# EAGLE board pihat (EAGLE 9.4.2)
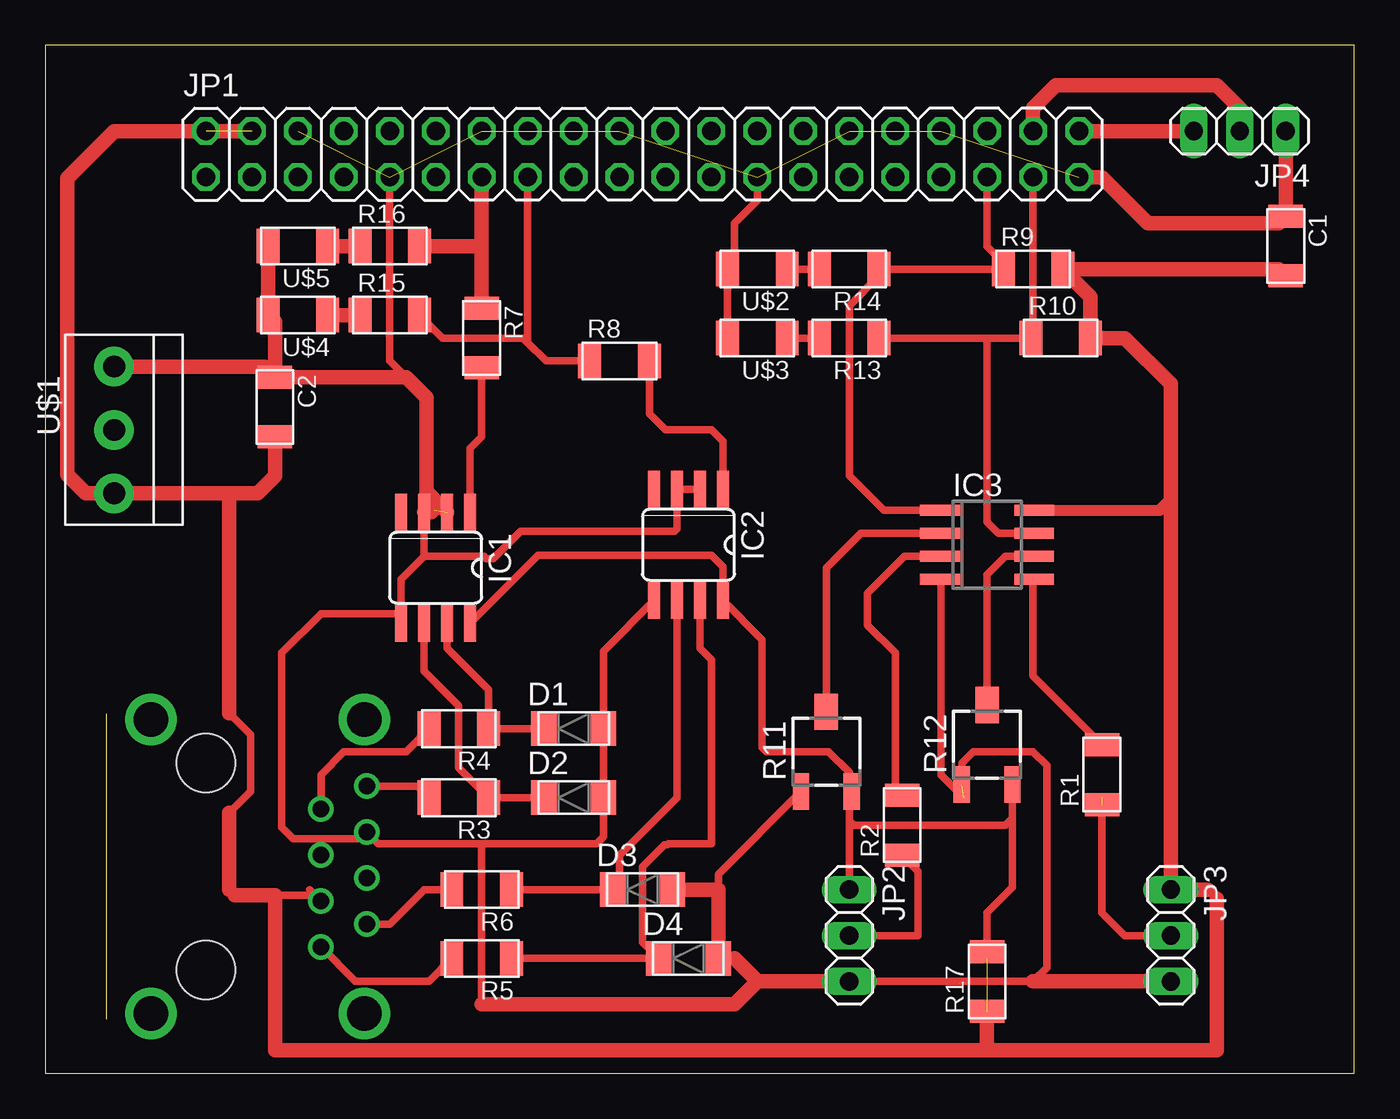
[diagram p0: board, top side]
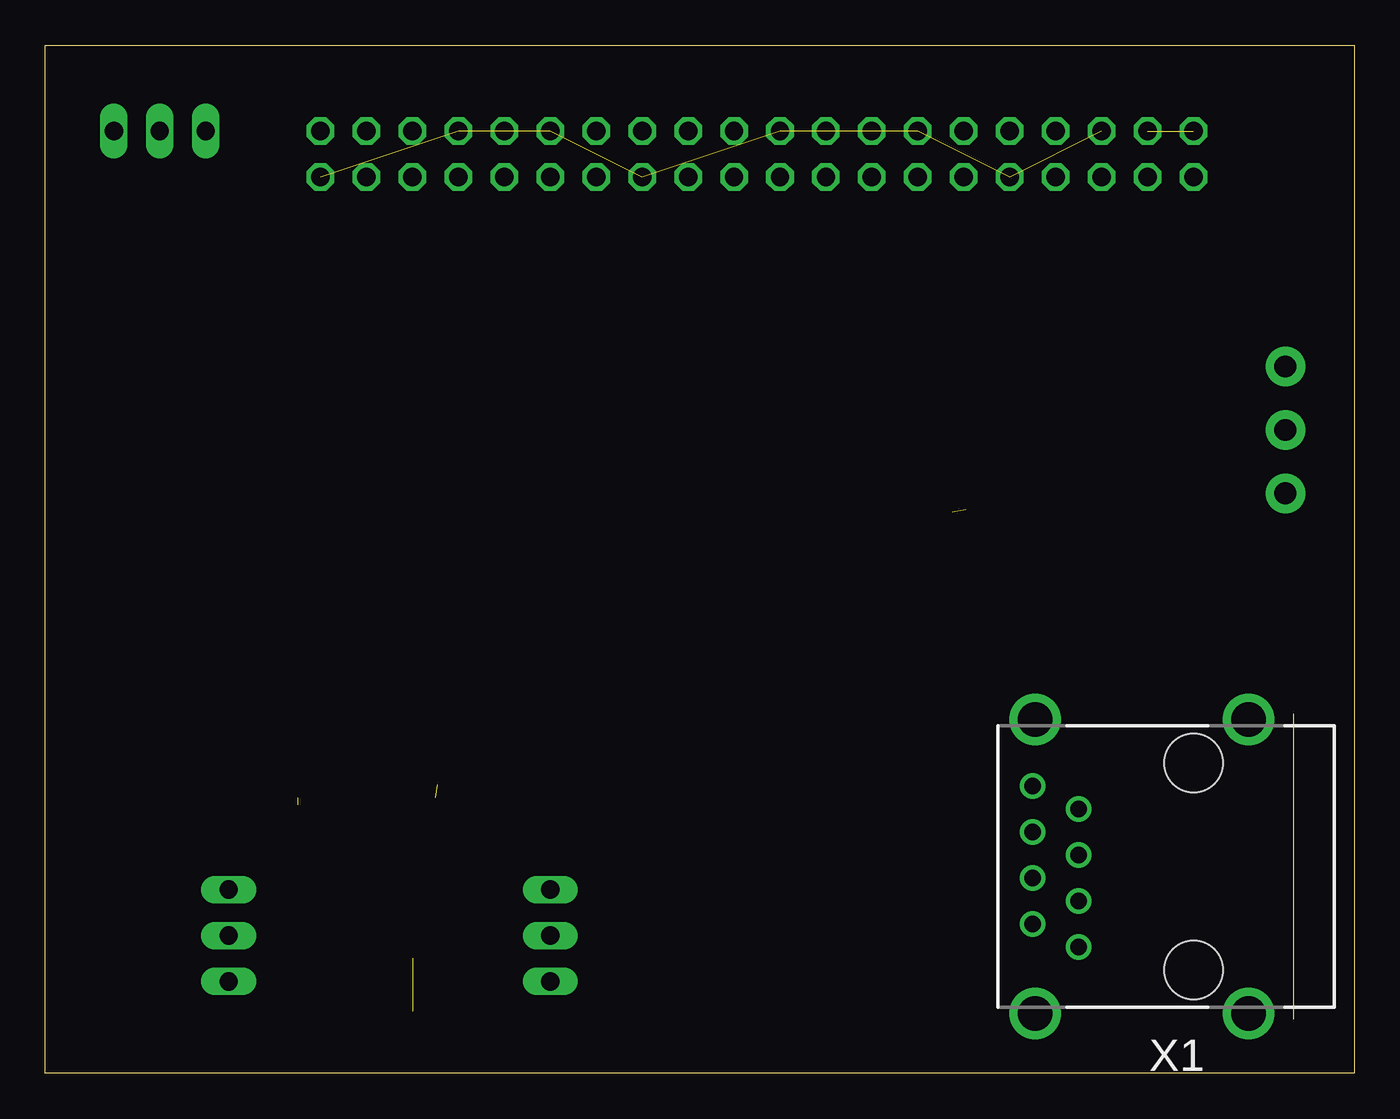
[diagram p1: board, bottom side, seen from below]

Size 72.37 x 56.82 mm. Coordinates in mm from the lower left corner, seen from the top.
Outline: 0,0 72.37,0 72.37,56.82 0,56.82 0,0
Copper layers (1*16): Top 0.035mm / dielectric 1.5mm / Bottom 0.035mm
Design rules "default": minimum track width 6mil, minimum drill 0.35mm, track to track 6mil, track to pad 6mil, pad to pad 6mil, via to via 6mil, smd to smd 6mil, copper to edge 40mil, drill to drill 6mil, minimum pad ring 10mil, minimum via ring 8mil, stop-mask expansion 4mil, vias tented up to drill 0mil, thermal gap 10mil

## Footprints (pad centres in the part's own frame; a part is rotated, then mirrored left to right if it is on the bottom)
C1206FAB = smd 1.27 x 1.905: 1 -1.651,0; 2 1.651,0
MINI-SMA = smd 1.4 x 1.9: ANODE 1.65,0; KATHODE -1.65,0
SO08 = smd 0.66 x 2.032: 1 -1.905,-3.073; 2 -0.635,-3.073; 3 0.635,-3.073; 4 1.905,-3.073; 5 1.905,3.073; 6 0.635,3.073; 7 -0.635,3.073; 8 -1.905,3.073
SO08' = smd 0.6 x 2.2: 1 -1.905,-2.6; 2 -0.635,-2.6; 3 0.635,-2.6; 4 1.905,-2.6; 5 1.905,2.6; 6 0.635,2.6; 7 -0.635,2.6; 8 -1.905,2.6
2X20 = drill 1.016 octagon: 1 -24.13,-1.27; 2 -24.13,1.27; 3 -21.59,-1.27; 4 -21.59,1.27; 5 -19.05,-1.27; 6 -19.05,1.27; 7 -16.51,-1.27; 8 -16.51,1.27; 9 -13.97,-1.27; 10 -13.97,1.27; 11 -11.43,-1.27; 12 -11.43,1.27; 13 -8.89,-1.27; 14 -8.89,1.27; 15 -6.35,-1.27; 16 -6.35,1.27; 17 -3.81,-1.27; 18 -3.81,1.27; 19 -1.27,-1.27; 20 -1.27,1.27; 21 1.27,-1.27; 22 1.27,1.27; 23 3.81,-1.27; 24 3.81,1.27; 25 6.35,-1.27; 26 6.35,1.27; 27 8.89,-1.27; 28 8.89,1.27; 29 11.43,-1.27; 30 11.43,1.27; 31 13.97,-1.27; 32 13.97,1.27; 33 16.51,-1.27; 34 16.51,1.27; 35 19.05,-1.27; 36 19.05,1.27; 37 21.59,-1.27; 38 21.59,1.27; 39 24.13,-1.27; 40 24.13,1.27
1X03 = drill 1.016 long: 1 -2.54,0; 2 0,0; 3 2.54,0
R1206FAB = smd 1.27 x 1.905: 1 -1.651,0; 2 1.651,0
3223G = smd 2 x 0.9: 1 -2.2,1.4; 3 -2.2,-1.4 | smd 2 x 1.3: 2 2.2,0
ED555DS-3DS = drill 1.2 pad 2.184: 1 -3.5,0; 2 0,0; 3 3.5,0
LED1206FAB = smd 1.27 x 1.905: 1 -1.651,0; 2 1.651,0
RJ45-SHIELD1 = drill 0.9 pad 1.4: 1 -4.445,6.35; 2 -3.175,8.89; 3 -1.905,6.35; 4 -0.635,8.89; 5 0.635,6.35; 6 1.905,8.89; 7 3.175,6.35; 8 4.445,8.89 | drill 1.9 pad 2.5: S1 -8.128,-3.048; S2 8.128,-3.048; S3 -8.128,8.76; S4 8.128,8.76 | hole 3.251: -5.715,0; 5.715,0

## Placement (x,y rotation side)
C1  [C1206FAB]  68.58,45.72 270 top
C2  [C1206FAB]  12.7,36.83 270 top
D1  CDBM1100-G  [MINI-SMA]  29.21,19.05 0 top
D2  CDBM1100-G  [MINI-SMA]  29.21,15.24 0 top
D3  CDBM1100-G  [MINI-SMA]  33.02,10.16 0 top
D4  CDBM1100-G  [MINI-SMA]  35.56,6.35 0 top
IC1  MAX481CSA  [SO08]  21.59,27.94 180 top
IC2  MAX481CSA  [SO08]  35.56,29.21 180 top
IC3  LM393D  [SO08']  52.07,29.21 270 top
JP1  [2X20]  33.02,50.8 0 top
JP2  PROX1  [1X03]  44.45,7.62 270 top
JP3  PROX2  [1X03]  62.23,7.62 270 top
JP4  OUT  [1X03]  66.04,52.07 180 top
R1  10K  [R1206FAB]  58.42,16.51 90 top
R2  10K  [R1206FAB]  47.37,13.72 90 top
R3  49R  [R1206FAB]  22.86,15.24 180 top
R4  49R  [R1206FAB]  22.86,19.05 180 top
R5  49R  [R1206FAB]  24.13,6.35 180 top
R6  49R  [R1206FAB]  24.13,10.16 180 top
R7  49  [R1206FAB]  24.13,40.64 270 top
R8  49R  [R1206FAB]  31.75,39.37 0 top
R9  10K  [R1206FAB]  54.61,44.45 0 top
R10  10K  [R1206FAB]  56.13,40.64 0 top
R11  [3223G]  43.18,17.78 90 top
R12  [3223G]  52.07,18.16 90 top
R13  100R  [R1206FAB]  44.45,40.64 180 top
R14  100R  [R1206FAB]  44.45,44.45 180 top
R15  100  [R1206FAB]  19.05,41.91 0 top
R16  100  [R1206FAB]  19.05,45.72 0 top
R17  10K  [R1206FAB]  52.07,5.08 90 top
U$1  TERM-1X03'-FABLAB'  [ED555DS-3DS]  3.81,35.56 90 top
U$2  LEDFAB1206  [LED1206FAB]  39.37,44.45 180 top
U$3  LEDFAB1206  [LED1206FAB]  39.37,40.64 180 top
U$4  LEDFAB1206  [LED1206FAB]  13.97,41.91 180 top
U$5  LEDFAB1206  [LED1206FAB]  13.97,45.72 180 top
X1  RJ45-6L21-B  [RJ45-SHIELD1]  8.89,11.43 90 bottom

## Library data of the parts
C1 C2 D1-D4 R1-R10 R13-R17 U$1-U$5 = fab
IC1 IC2 = maxim; MF: MAXIM; MPN: MAX481CSA; OC_FARNELL: unknown; OC_NEWARK: 90C3817
IC3 = linear
JP1-JP4 = pinhead
R11 R12 = pot
X1 = con-tycoelectronics; OC_FARNELL: unknown; OC_NEWARK: unknown

## Nets
GND: C1.1 C2.1 D1.ANODE D2.ANODE D3.ANODE D4.ANODE IC1.2 IC1.3 IC1.5 IC2.2 IC2.3 IC2.5 IC3.4 JP1.6 JP1.9 JP1.14 JP1.20 JP1.25 JP1.30 JP1.34 JP1.39 JP2.3 JP3.3 JP4.1 R11.1 R12.1 U$1.3 U$2.2 U$3.2 U$4.2 U$5.2 X1.6
N$1: IC3.5 R1.2
N$2: IC3.3 R2.2
N$3: D1.KATHODE IC1.7 R4.1
N$4: D2.KATHODE IC1.6 R3.1
N$5: R14.2 U$2.1
N$6: D3.KATHODE IC2.6 R6.1
N$7: D4.KATHODE IC2.7 R5.1
N$8: JP2.2 R2.1
N$9: R3.2 X1.8
N$10: R4.2 X1.7
N$11: R5.2 X1.1
N$12: R6.2 X1.2
N$13: R13.2 U$3.1
N$14: IC1.1 R7.2
N$15: IC2.1 R8.2
N$16: JP1.13 R7.1 R16.2
N$17: JP1.15 R8.1 R15.2
N$18: IC3.7 JP1.37 R10.1 R13.1
N$19: IC3.1 JP1.35 R9.1 R14.1
N$20: IC3.6 R12.2
N$21: IC3.2 R11.2
N$22: R15.1 U$4.1
N$23: JP3.2 R1.1
N$24: R16.1 U$5.1
N$25: JP1.40 JP4.3
N$26: JP1.38 JP4.2
VDD: C1.2 C2.2 IC1.8 IC2.8 IC3.8 JP1.2 JP1.4 JP2.1 JP3.1 R9.2 R10.2 R11.3 R12.3 R17.1 U$1.1 X1.3

## Tracks (layer width: path | path; a pad name or v marks a point on that pad's centre or on a via)
GND  (9 unrouted)
  Top 0.406: IC3.4 49.53,27.25 49.53,16.51 50.8,15.24 | 24.13,12.7 18.41,12.7 X1.6 17.4,12.95 13.72,12.95 13.08,13.59 13.08,23.24 15.24,25.4 19.68,25.4 | 24.13,12.7 30.48,12.7 30.86,13.08 D2.ANODE D1.ANODE 30.86,23.34 IC2.5 | 37.21,9.78 D4.ANODE 38.1,6.35 | 24.13,12.7 24.13,3.81 | IC1.5 19.68,25.4 | 19.68,25.4 19.68,27.3 20.95,28.57 | 20.95,28.57 IC1.3 | IC2.2 IC2.3 34.92,30.1 34.8,29.97 26.29,29.97 24.77,28.45 24.38,28.45 24.26,28.57 20.95,28.57 | 12.12,39.06 C2.1 | JP1.9 19.05,39.37 19.94,38.48 | U$4.2 12.7,41.53 | U$3.2 37.72,44.07 38.1,44.45 U$2.2 38.1,44.83 38.1,46.99 39.37,48.26 JP1.25 | JP2.3 54.61,5.08 55.37,5.84 55.37,17.02 54.61,17.78 51.31,17.78 50.67,17.14 R12.1 | 37.21,10.16 37.21,11.01 R11.1 41.91,15.71 | 68.2,46.99 C1.1
  Top 0.813: 24.13,3.81 38.1,3.81 39.37,5.08 | IC1.2 21.08,32.16 21.08,37.34 19.94,38.48 C2.1 12.7,41.53 | U$1.3 12.12,39.06 | IC1.3 21.34,31.01 21.46,31.14 | U$5.2 U$4.2 | 39.37,5.08 JP2.3 | 54.61,5.08 JP3.3 | D4.ANODE 37.21,10.16 D3.ANODE | C1.1 JP4.1 | JP1.39 58.42,49.53 60.96,46.99 68.2,46.99 | 38.1,6.35 39.37,5.08
N$1
  Top 0.406: R1.2 54.61,21.97 54.61,27.25 IC3.5
N$2
  Top 0.406: R2.2 46.99,15.75 46.99,23.24 45.47,24.77 45.47,26.54 47.5,28.57 IC3.3
N$3
  Top 0.406: IC1.7 22.23,23.5 24.51,21.21 R4.1 D1.KATHODE
N$4
  Top 0.406: D2.KATHODE R3.1 22.86,16.89 22.86,20.32 20.95,22.23 IC1.6
N$5
  Top 0.406: U$2.1 R14.2
N$6
  Top 0.406: R6.1 D3.KATHODE 31.75,10.54 31.75,12.06 34.92,15.24 IC2.6
N$7
  Top 0.406: R5.1 D4.KATHODE 33.02,7.24 33.02,11.43 34.24,12.65 34.39,12.65 34.45,12.7 36.83,12.7 36.83,22.86 36.2,23.5 IC2.7
N$8
  Top 0.406: JP2.2 48.26,7.62 48.26,11.18 R2.1
N$9
  Top 0.406: X1.8 20.57,15.88 R3.2
N$10
  Top 0.406: X1.7 15.24,16.51 16.51,17.78 16.91,17.78 18.39,17.78 19.94,17.78 R4.2
N$11
  Top 0.406: X1.1 17.14,5.08 18.39,5.08 21.21,5.08 R5.2
N$12
  Top 0.406: R6.2 20.95,10.16 19.05,8.26 X1.2
N$13
  Top 0.406: U$3.1 R13.2
N$14
  Top 0.406: R7.2 24.13,35.18 23.5,34.54 IC1.1
N$15
  Top 0.406: IC2.1 37.47,34.92 36.83,35.56 34.29,35.56 33.4,36.45 R8.2
N$16
  Top 0.813: R7.1 24.13,45.72 | 24.13,45.72 JP1.13 | R16.2 24.13,45.72
N$17
  Top 0.406: R8.1 27.69,39.37 26.67,40.39 | 26.67,40.39 JP1.15 | R15.2 21.97,40.64 26.42,40.64 26.67,40.39
N$18
  Top 0.406: R13.1 52.07,40.64 | 52.07,40.64 R10.1 54.61,41.42 JP1.37 | IC3.7 52.7,29.84 52.07,30.48 52.07,40.64
N$19
  Top 0.406: JP1.35 52.07,45.72 53.34,44.45 R9.1 R14.1 46.1,44.07 44.45,42.42 44.45,33.02 46.35,31.11 IC3.1
N$20
  Top 0.406: R12.2 52.07,27.56 53.09,28.57 IC3.6
N$21
  Top 0.406: R11.2 43.18,27.94 45.09,29.84 IC3.2
N$22
  Top 0.813: U$4.1 R15.1
N$23  (1 unrouted)
  Top 0.406: JP3.2 59.69,7.62 58.42,8.89 58.42,15.24
N$24
  Top 0.813: U$5.1 R16.1
N$25
  Top 0.813: JP1.40 JP4.3
N$26
  Top 0.813: JP1.38 54.61,53.34 55.88,54.61 64.77,54.61 66.04,53.34 JP4.2
VDD  (2 unrouted)
  Top 0.406: IC1.8 27.25,28.63 36.83,28.63 37.47,27.99 IC2.8 39.62,23.98 39.62,18.03 39.88,17.78 43.31,17.78 44.45,16.64 44.45,15.45 | 14.61,10.16 14.92,9.84 | 14.92,9.84 X1.3 | 10.16,19.9 11.35,18.7 11.35,15.59 10.16,14.39 | 10.16,10.16 10.48,9.84 | 12.7,9.84 14.92,9.84 | JP2.1 44.45,13.97 | 44.45,13.97 44.45,15.45 | 44.45,15.45 R11.3 | R12.3 53.47,14.1 | 44.45,13.97 44.7,13.72 53.09,13.72 53.47,14.1 | 68.2,44.45 C1.2 | 64.77,9.65 64.26,10.16 | 53.47,14.1 53.47,10.29 52.07,8.89 52.07,6.35
  Top 0.61: IC3.8 61.59,31.11 62.23,31.75
  Top 0.813: 10.16,32.06 U$1.1 2.23,32.06 1.22,33.07 1.22,49.48 3.81,52.07 JP1.4 | 10.16,32.06 11.74,32.06 12.7,33.02 C2.2 | 10.16,32.06 10.16,19.9 | 10.16,14.39 10.16,10.16 | 10.48,9.84 12.7,9.84 12.7,1.27 52.07,1.27 | 68.2,44.45 R9.2 57.78,42.93 R10.2 59.69,40.64 62.23,38.1 62.23,31.75 JP3.1 64.26,10.16 | 52.07,1.27 64.77,1.27 64.77,9.65 | R17.1 52.07,1.27